# Altium PCB PCB1.PcbDoc
Units mm, origin at the board's own origin, x right, y up, seen from the top; angles counter-clockwise.
Board outline 251 x 111.5 mm, 2 copper layers (Top Layer, Bottom Layer); 152 components, 141 nets, 501 pads, 350 vias.
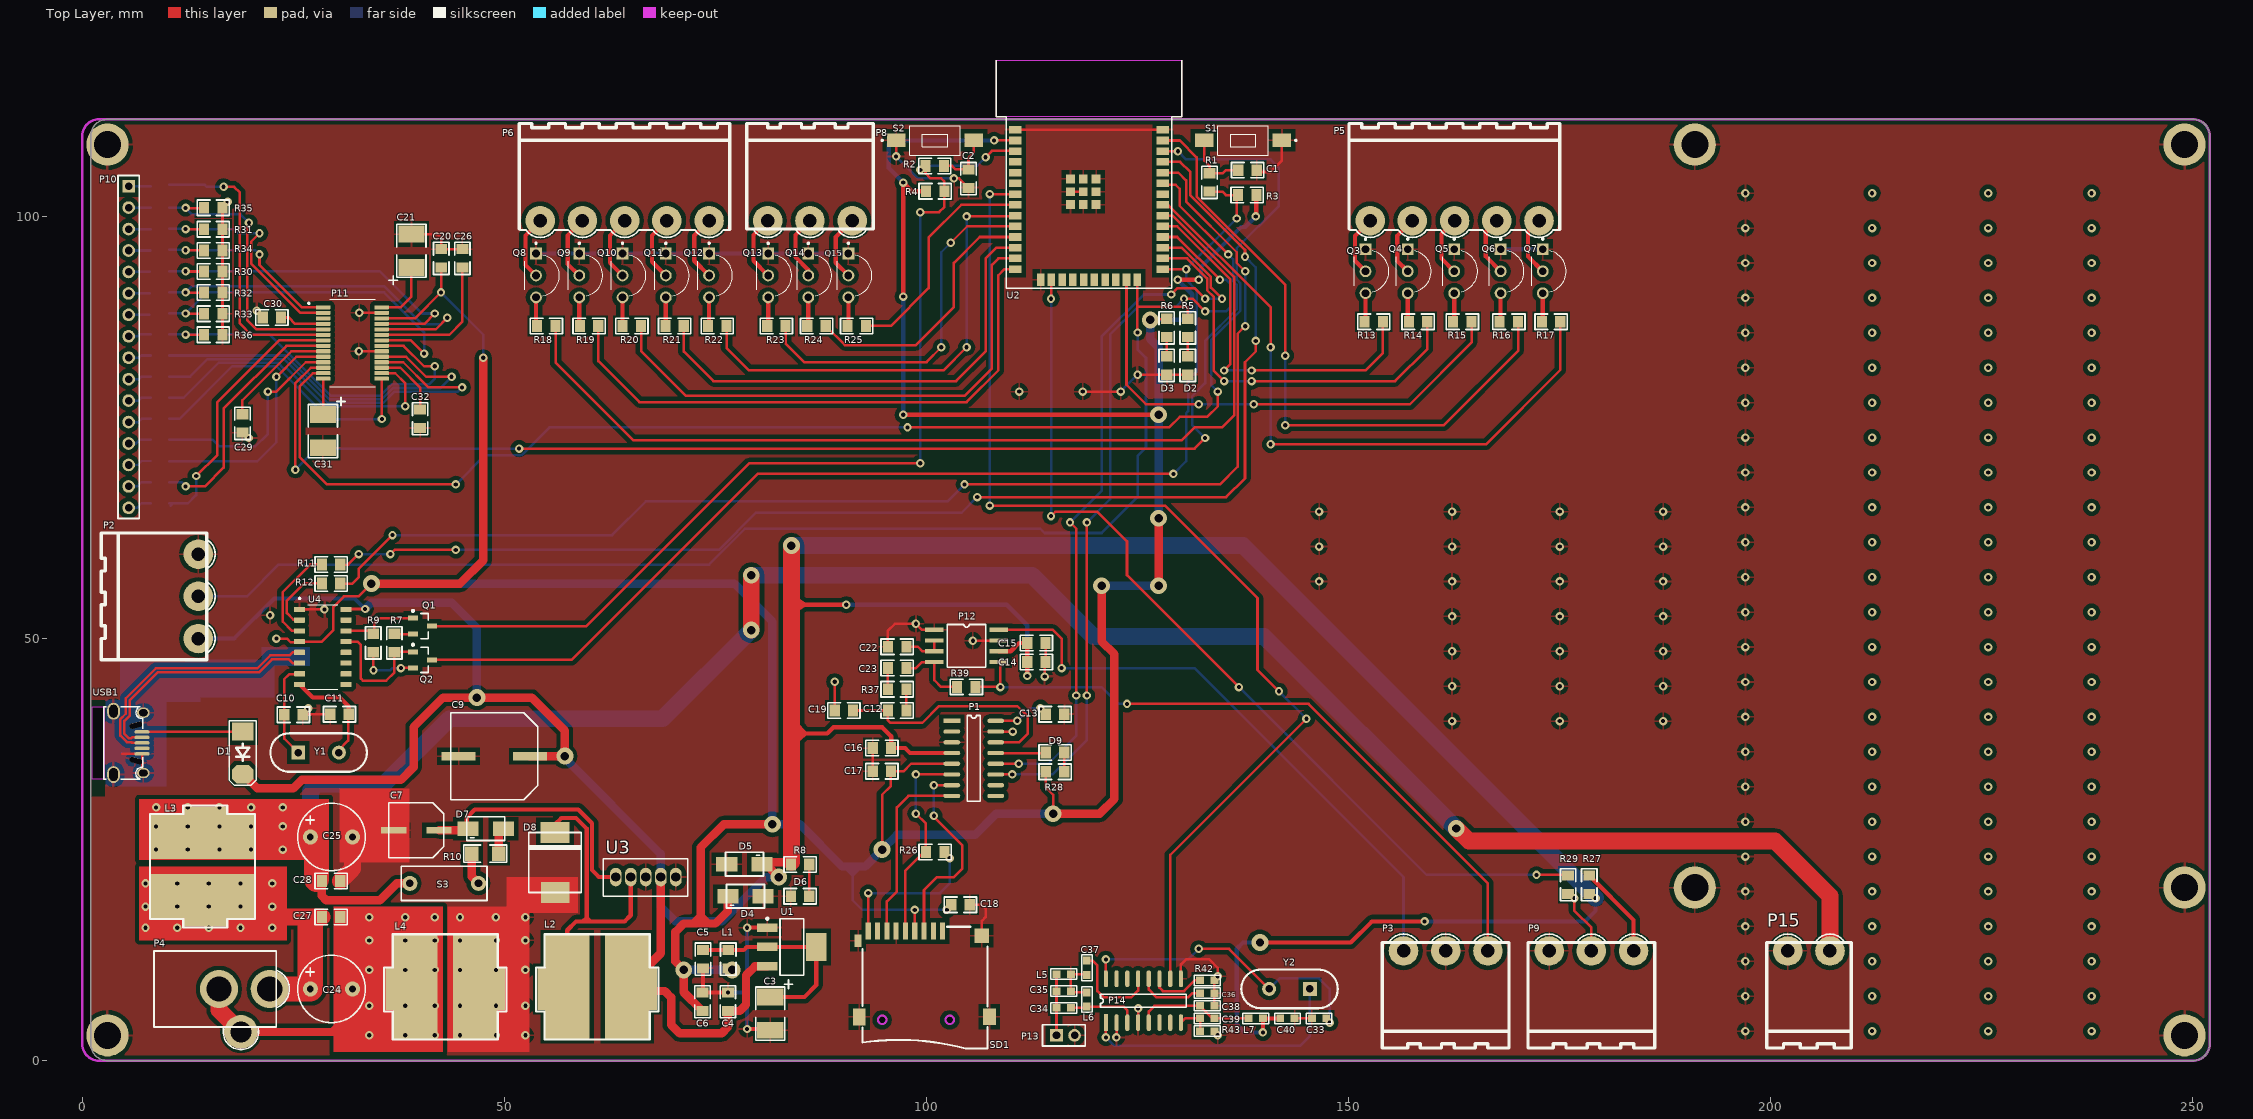
[diagram p0: Top Layer view]
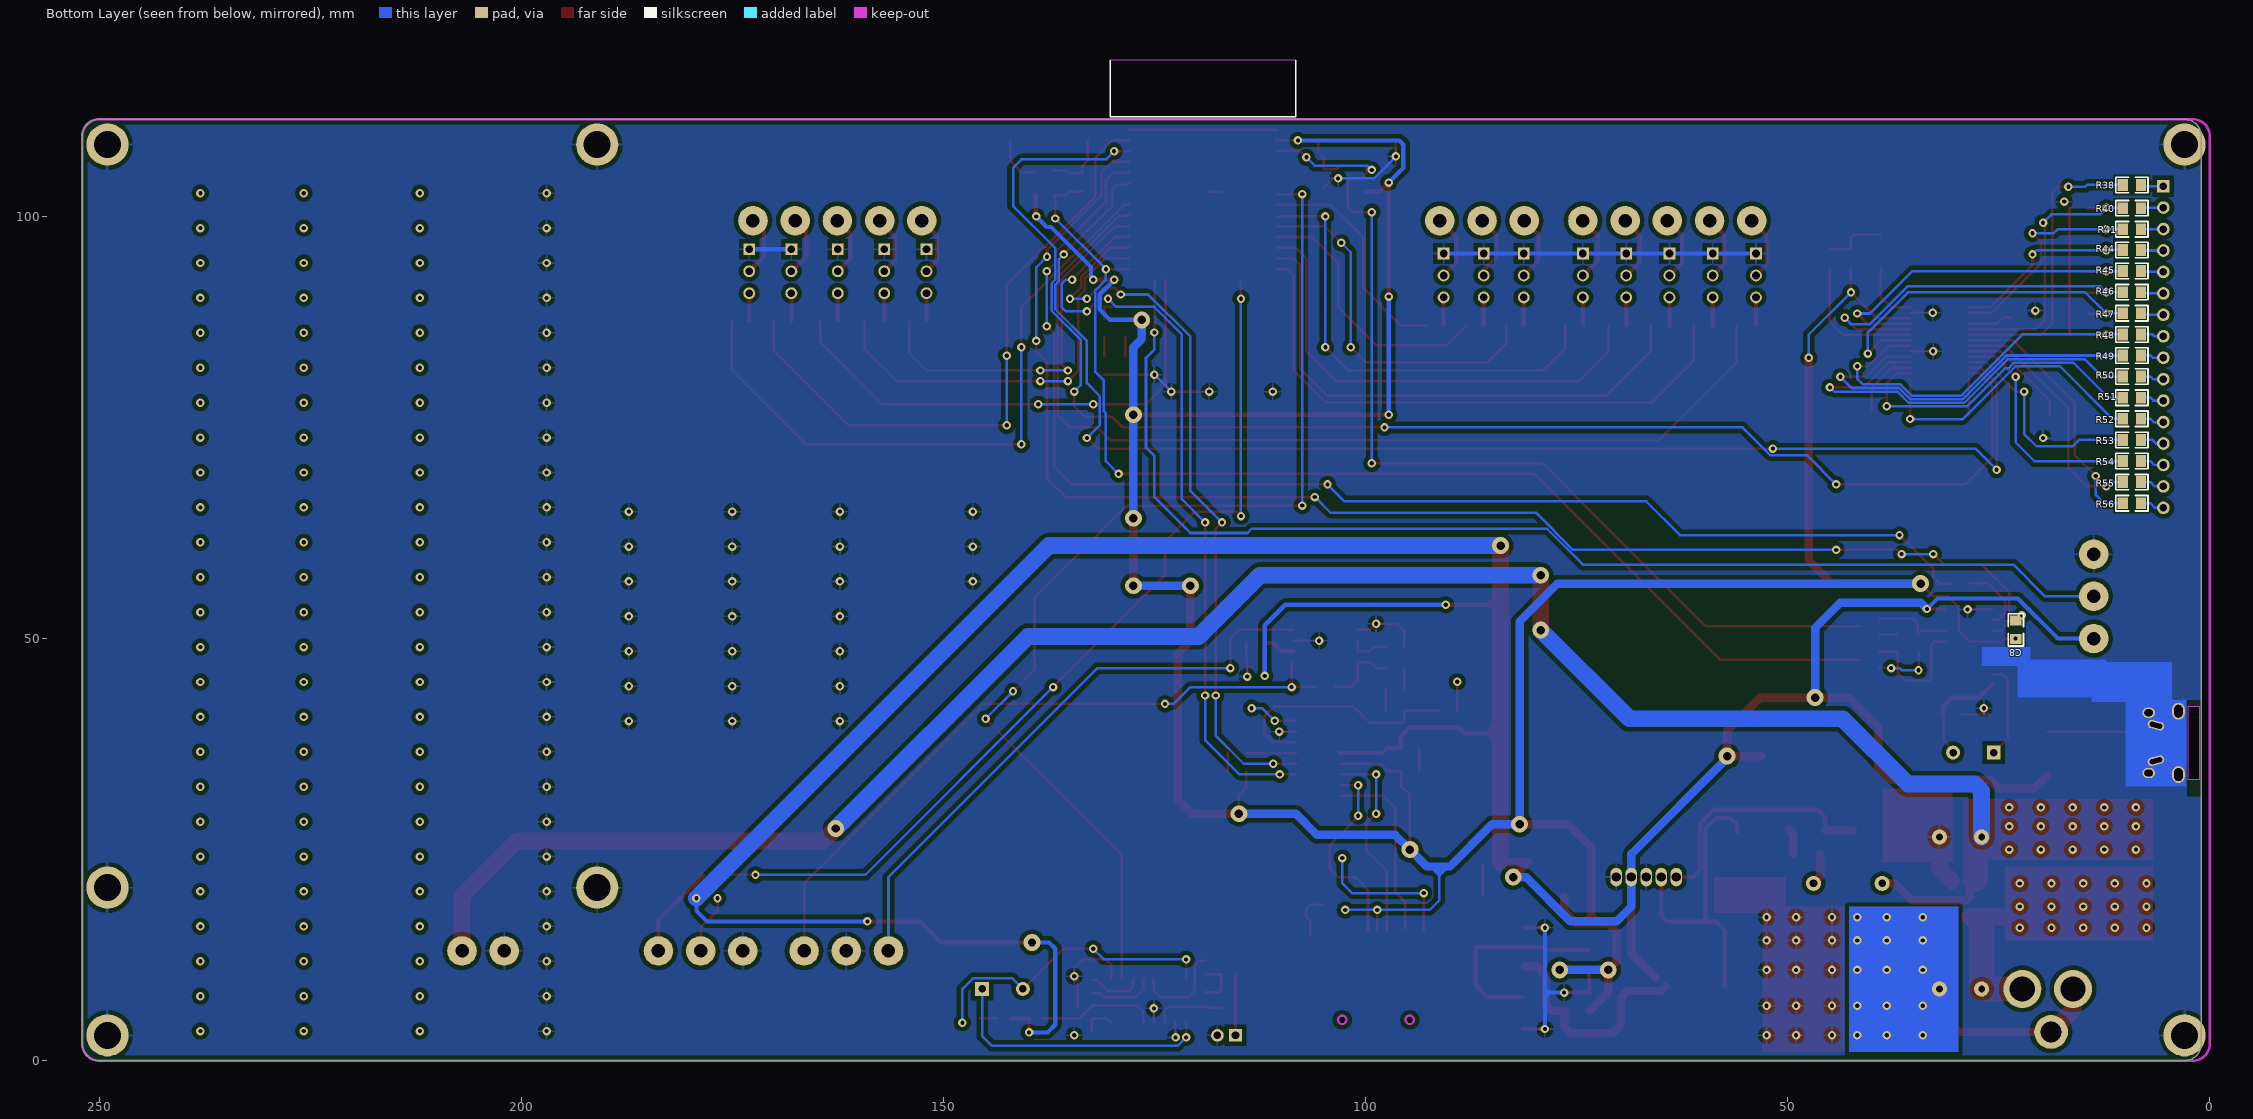
[diagram p1: Bottom Layer view, seen from below]

## Layer stack, top to bottom
Top Layer: signal copper 0.0356
Dielectric: dielectric 0.32, FR-4, Dk 4.8
Bottom Layer: signal copper 0.0356

## Board outline
1,2 ccw(c3,2) 3,0 250,0 ccw(c250,2) 252,2 252,109.5 ccw(c250,109.5) 250,111.5 3,111.5 ccw(c3,109.5) 1,109.5

## Design rules (kind name [scope] priority, off if disabled: settings)
Clearance [All] p1: gap=0.125
DiffPairsRouting [All] p1: maxlimit=0.18 minlimit=0.18 mostfreqgap=0.18 maxuncoupledlength=12.7
PolygonConnect [All] p1: connectstyle=Relief reliefconductorwidth=0.254 reliefentries=4 polygonreliefangle="90 Angle"
RoutingVias [All] p1: holewidth=0.5 width=1 viastyle="Through Hole" minholewidth=0.5 minwidth=1 maxholewidth=1 maxwidth=2
SilkscreenOverComponentPads [All] p1: minsilkscreentomaskgap=0.254
SolderMaskExpansion [All] p1: expansion=0.102
Width [All] p1: maxlimit=3 minlimit=0.2 preferedwidth=0.3
26 further rules are at their usual default settings.

## Classes and differential pairs
differential pair D: +D_P -D_N

## Components (designator, comment, footprint, x,y, rotation, side; value= is the part's Value field where it differs from the comment)
C1 "Cap" smd_805 138,105.5 r270 top
C2 "Cap" smd_805 105,104.5 r180 top
C3 "Cap Pol1" C_B 81.5,5.5 r180 top
C4 "Cap" smd_805 76.5,7 r180 top
C5 "Cap" smd_805 73.5,12 r0 top
C6 "Cap" smd_805 73.5,7 r180 top
C7 "Cap Pol1" C_CYL_SMD2 39.5,27.5 r0 top
C8 "Cap" smd_805 23,51 r180 bottom
C9 "Cap Pol1" C_CYL_SMD 49,36 r0 top
C10 "Cap" smd_805 25,41 r270 top
C11 "Cap" smd_805 30.5,41 r90 top
C12 "Cap" smd_805 96.5,41.5 r270 top
C13 "Cap" smd_805 115.25,41 r90 top
C14 "Cap" smd_805 113,47.25 r270 top
C15 "Cap" smd_805 113,49.5 r270 top
C16 "Cap" smd_805 94.75,37 r90 top
C17 "Cap" smd_805 94.75,34.25 r90 top
C18 "Cap" smd_805 104,18.5 r270 top
C19 "Cap" smd_805 90.25,41.449 r90 top
C20 "Cap" smd_805 42.5,95 r0 top
C21 "Cap Pol1" c_b 39,96 r0 top
C22 "Cap" smd_805 96.551,49 r90 top
C23 "Cap" smd_805 96.5,46.534 r270 top
C24 "Cap Pol1" cap_pol_25v 29.5,8.5 r0 top
C25 "Cap Pol1" cap_pol_25v 29.5,26.5 r0 top
C26 "Cap" smd_805 45,95 r0 top
C27 "Cap" smd_805 29.5,17 r90 top
C28 "Cap" smd_805 29.5,21.25 r90 top
C29 "Cap" smd_805 19,75.5 r180 top
C30 "Cap" smd_805 22.5,88 r90 top
C31 "Cap Pol1" C_B 28.5,74.5 r180 top
C32 "Cap" smd_805 40,76 r0 top
C33 "Cap" 0603 146.5,5 r180 top
C34 "Cap" 0603 116.25,6.25 r0 top
C35 "Cap" 0603 116.25,8.25 r0 top
C36 "Cap" 0603 133.25,8 r0 top
C37 "Cap" 0603 119,11 r270 top
C38 "Cap" 0603 133.25,6.5 r0 top
C39 "Cap" 0603 133.25,5 r0 top
C40 "Cap" 0603 142.75,5 r180 top
D1 "Diode" DO-214AC 19,39 r270 top
D2 "LED1" smd_805 130.924,82.317 r0 top
D3 "LED1" smd_805 128.424,82.317 r0 top
D4 "SMBJ 3V3" TVS 78.5,19.5 r90 top
D5 "SMBJ 5V" TVS 78.5,23.25 r270 top
D6 "LED0" smd_805 85,19.5 r270 top
D7 "Diode 1N4007" TVS 47.75,27.5 r90 top
D8 "SM5822" DO_214_AB_SMC 56,23.5 r90 top
D9 "LED1" smd_805 115.199,36.517 r270 top
L1 "FERRIT BEAD" smd_805 76.5,12 r0 top
L2 "Inductor" induc_smd 61,9 r0 top
L3 "Inductor" induc_smd 14,23 r90 top
L4 "Inductor" induc_smd 43,9 r0 top
L5 "Inductor" 0603 116.25,10.25 r180 top
L6 "Inductor" 0603 119,7.25 r270 top
L7 "Inductor" 0603 139,5 r0 top
P1 "Header 8X2A" SOP16 103,40.25 r0 top
P2 "SERVO MOTOR" PHOENIX_3 13.75,55 r270 top
P3 "SPEAKEROUT" PHOENIX_3 161.5,13 r0 top
P4 "JACK INPUT" ADAP_JACK 8.5,4 r0 top
P5 "Header 5" PHOENIX_5 162.5,99.5 r180 top
P6 "Header 5" PHOENIX_5 64.199,99.5 r180 top
P8 "Header 3" PHOENIX_3 86.199,99.5 r180 top
P9 "Header 3" PHOENIX_3 178.75,13 r0 top
P10 "Header 16" HDR1X16 5.5,103.58 r270 top
P11 "Header 14X2" ssop28 32,85 r0 top
P12 "8002A" sop8 104.75,49.25 r0 top
P13 "Header 2" HDR1X2 115,3 r0 top
P14 "Header 8X2A" SOP16 121.25,4.5 r90 top
P15 "+12v Outpot" PHOENIX_2 204.5,12.84 r0 top
Q1 "J3Y-NPN" sot-23 40.256,51.5 r270 top
Q2 "J3Y-NPN" sot-23 40.256,47.5 r270 top
Q3 "NPN" to-92 152,93.5 r270 top
Q4 "NPN" to-92 157,93.5 r270 top
Q5 "NPN" to-92 162.5,93.5 r270 top
Q6 "NPN" to-92 168,93.5 r270 top
Q7 "NPN" to-92 173,93.5 r270 top
Q8 "NPN" to-92 53.75,93 r270 top
Q9 "NPN" to-92 58.875,93 r270 top
Q10 "NPN" to-92 64,93 r270 top
Q11 "NPN" to-92 69.125,93 r270 top
Q12 "NPN" to-92 74.25,93 r270 top
Q13 "NPN" to-92 81.25,93 r270 top
Q14 "NPN" to-92 86,93 r270 top
Q15 "NPN" to-92 90.75,93 r270 top
R1 "Res1" smd_805 133.5,104 r0 top
R2 "Res1" smd_805 100.949,106 r270 top
R3 "Res1" smd_805 138,102.5 r90 top
R4 "Res1" smd_805 101,103 r270 top
R5 "Res1" smd_805 130.975,86.817 r180 top
R6 "Res1" smd_805 128.475,86.817 r180 top
R7 "Res1" smd_805 37,49.5 r180 top
R8 "Res1" smd_805 85,23.25 r270 top
R9 "Res1" smd_805 34.5,49.5 r180 top
R10 "Res2" smd_1206 47.75,24.5 r270 top
R11 "Res1" smd_805 29.5,58.75 r90 top
R12 "Res1" smd_805 29.5,56.5 r90 top
R13 "Res1" smd_805 153,87.5 r90 top
R14 "Res1" smd_805 158.25,87.5 r90 top
R15 "Res1" smd_805 163.5,87.5 r90 top
R16 "Res1" smd_805 169,87.5 r90 top
R17 "Res1" smd_805 174,87.5 r90 top
R18 "Res1" smd_805 55,87 r90 top
R19 "Res1" smd_805 60.062,87 r90 top
R20 "Res1" smd_805 65.125,87 r90 top
R21 "Res1" smd_805 70.187,87 r90 top
R22 "Res1" smd_805 75.25,87 r90 top
R23 "Res1" smd_805 82.25,87 r90 top
R24 "Res1" smd_805 87,87 r90 top
R25 "Res1" smd_805 91.75,87 r90 top
R26 "Res1" smd_805 101,24.75 r270 top
R27 "Res1" smd_805 178.525,20.86 r180 top
R28 "Res1" smd_805 115.199,34.25 r270 top
R29 "Res1" smd_805 176.025,20.86 r180 top
R30 "Res1" smd_805 15.5,93.5 r270 top
R31 "Res1" smd_805 15.5,98.5 r270 top
R32 "Res1" smd_805 15.5,91 r270 top
R33 "Res1" smd_805 15.5,88.5 r270 top
R34 "Res1" smd_805 15.5,96 r270 top
R35 "Res1" smd_805 15.5,101.051 r270 top
R36 "Res1" smd_805 15.5,86 r270 top
R37 "Res1" smd_805 96.5,44.017 r270 top
R38 "Res1" smd_805 9.25,103.75 r270 bottom
R39 "Res1" smd_805 104.75,44.25 r90 top
R40 "Res1" smd_805 9.25,101 r270 bottom
R41 "Res1" smd_805 9.25,98.5 r270 bottom
R42 "Res1" 0603 133.25,9.5 r180 top
R43 "Res1" 0603 133.25,3.5 r180 top
R44 "Res1" smd_805 9.25,96.051 r270 bottom
R45 "Res1" smd_805 9.25,93.551 r270 bottom
R46 "Res1" smd_805 9.25,91.051 r270 bottom
R47 "Res1" smd_805 9.25,88.551 r270 bottom
R48 "Res1" smd_805 9.25,86.051 r270 bottom
R49 "Res1" smd_805 9.25,83.551 r270 bottom
R50 "Res1" smd_805 9.25,81.051 r270 bottom
R51 "Res1" smd_805 9.25,78.551 r270 bottom
R52 "Res1" smd_805 9.25,76.051 r270 bottom
R53 "Res1" smd_805 9.25,73.551 r270 bottom
R54 "Res1" smd_805 9.25,71.051 r270 bottom
R55 "Res1" smd_805 9.25,68.551 r270 bottom
R56 "Res1" smd_805 9.25,66.051 r270 bottom
S1 "SWITCH" SW_SMd_2pin 137.5,109 r180 top
S2 "SWITCH" SW_SMd_2pin 101,109 r0 top
S3 "SW-SPST" KEY1 43,21 r0 top
SD1 "SD_CARD" SD_CARD_HOLDER 99,8.75 r180 top
U1 "AMS1117-3.3" SOT223 84,13.5 r270 top
U2 "ESP32-WROOM-32" ESP32-WROOM-32 119.25,105 r0 top
U3 "LM2576HVT" LM2576 66.75,21.75 r0 top
U4 "CH340G" SOIC127P600X180-16N 28.5,49 r0 top
USB1 "USB MICRO USB_AB_receptacle" USB_MICRO_USB_AB_receptacle 38.75,47.75 r180 top
Y1 "XTAL" crystal 28,36.5 r0 top
Y2 "XTAL" crystal 143,8.5 r180 top

## Footprints (in the part's own frame and the unit in brackets; to place one, negate y for a bottom-side part, rotate by r counter-clockwise, add the part's x,y. Pads: shape width x height; smd on the part's side, far side on the other; paste and mask are expansions set on the pad)
0603 [mil]
  rect 37x35 smd: 1(-33.5,0) 2(33.5,0)
  silkscreen extent -60,-24 60,24, body extent -31,-16 31,16, height 12
ADAP_JACK [mm]
  round 4.5 hole 3: 1(7.7,4.5) 2(13.7,4.5)
  round 4 hole 2.5: 1(10.3,-0.6)
  silkscreen extent 0,-2.68 16.04,9, body extent -0.1,-0.5 14.7,9, height 10
C_B [mm]
  rect 3.1x2 smd: 1(-0.002,-2.041) 2(-0.002,1.896)
  silkscreen extent -2.67,-4.07 1.73,3.07, body extent -1.4,-1.78 1.4,1.78, height 2.23
c_b [mm]
  rect 3.1x2 smd: 1(-0.002,-2.041) 2(-0.002,1.896)
  silkscreen extent -2.67,-4.07 1.73,3.07, body extent -1.4,-1.78 1.4,1.78, height 2.23
C_CYL_SMD [mm]
  rect 4x1 smd: 1(4.039,0.076) 2(-4.42,0.076)
  silkscreen extent -5.33,-5.08 4.97,5.22, body extent -5.33,-5.08 4.97,5.22, height 10
C_CYL_SMD2 [mm]
  rect 3x0.8 smd: 1(2.769,-0.203) 2(-2.616,-0.203)
  silkscreen extent -3.17,-3.45 3.32,3.05, body extent -3.17,-3.45 3.32,3.05, height 5
cap_pol_25v [mm]
  round 1.8 hole 0.8: 1(-2.475,0) 2(2.525,0)
  silkscreen extent -3.97,-4 4.03,4
crystal [mil] "16 Mhz Crystal footprint"
  rect 65x65 hole 35: 1(-95,0)
  round 65 hole 35: 2(95,0)
  silkscreen extent -225,-90 225,90, body extent -220,-89 220,95, height 143
DO-214AC [mil] "1N4001-7 SMD DIODE"
  rect 85x100 smd: 1(0,0)
  oct 85x100 smd: 2(200,0)
  silkscreen extent -50,-63 250,64, body extent -8,-55 208,55, height 88
DO_214_AB_SMC [mm]
  rect 2.5x3.4 smd: 1(-3.581,-0.025) 2(3.531,0)
  silkscreen extent -3.58,-3.12 3.53,3.1
ESP32-WROOM-32 [mm]
  rect 1.5x0.9 smd: 1(-8.75,5.26) 2(-8.75,3.99) 3(-8.75,2.72) 4(-8.75,1.45) 5(-8.75,0.18) 6(-8.75,-1.09) 7(-8.75,-2.36) 8(-8.75,-3.63) 9(-8.75,-4.9) 10(-8.75,-6.17) 11(-8.75,-7.44) 12(-8.75,-8.71) 13(-8.75,-9.98) 14(-8.75,-11.25) 25(8.75,-11.25) 26(8.75,-9.98) 27(8.75,-8.71) 28(8.75,-7.44) 29(8.75,-6.17) 30(8.75,-4.9) 31(8.75,-3.63) 32(8.75,-2.36) 33(8.75,-1.09) 34(8.75,0.18) 35(8.75,1.45) 36(8.75,2.72) 37(8.75,3.99) 38(8.75,5.26)
  rect 0.9x1.5 smd: 15(-5.72,-12.51) 16(-4.45,-12.51) 17(-3.18,-12.51) 18(-1.91,-12.51) 19(-0.64,-12.51) 20(0.63,-12.51) 21(1.9,-12.51) 22(3.17,-12.51) 23(4.44,-12.51) 24(5.71,-12.51)
  rect 1.05x1.05 smd: DAP[1](-2.2,-0.56) DAP[2](-0.68,-0.56) DAP[3](0.84,-0.56) DAP[4](-2.2,-2.08) DAP[5](-0.68,-2.08) DAP[6](0.84,-2.08) DAP[7](-2.2,-3.6) DAP[8](-0.68,-3.6) DAP[9](0.84,-3.6)
  Keep-Out Layer region: 11,6.8 -11,6.8 -11,13.5 11,13.5
  Keep-Out Layer region: 11,6.8 -11,6.8 -11,13.5 11,13.5
  silkscreen extent -11,-13.5 11,13.5
HDR1X2 [mm] "Connector; Header; 2 Position"
  rect 1.5x1.5 hole 0.9: 1(0.4,0)
  round 1.5 hole 0.9: 2(2.54,0)
  silkscreen extent -1.27,-1.27 3.81,1.27
HDR1X16 [mm] "Connector; Header; 16 Position"
  rect 1.5x1.5 hole 0.9: 1(0,0)
  round 1.5 hole 0.9: 2(2.54,0) 3(5.08,0) 4(7.62,0) 5(10.16,0) 6(12.7,0) 7(15.24,0) 8(17.78,0) 9(20.32,0) 10(22.86,0) 11(25.4,0) 12(27.94,0) 13(30.48,0) 14(33.02,0) 15(35.56,0) 16(38.1,0)
  silkscreen extent -1.27,-1.27 39.37,1.27
induc_smd [mm]
  rect 2x5 smd: 1(-6.096,-0.508) 2(6.096,-0.508)
  rect 5.3x12.4 smd: 1(-3.556,-0.254) 2(3.556,-0.254)
  silkscreen extent -7.23,-6.48 7.24,5.97
KEY1 [mm]
  round 1.8 hole 0.9: 1(-4.191,0) 2(3.937,0)
  silkscreen extent -5.21,-2.03 4.95,2.03, body extent -5.21,-2.03 4.95,2.03, height 7.1
LM2576 [mm]
  oval 1.4x2.2 hole 1.1: 1(-3.556,0) 2(-1.778,0) 3(0,0) 4(1.778,0) 5(3.556,0)
  silkscreen extent -5.04,-2.27 4.99,2.18
PHOENIX_2 [mm]
  round 3.5 hole 1.6: 1(-2.487,0.16) 2(2.513,0.16)
  silkscreen extent -4.99,-11.34 5.01,2.16
PHOENIX_3 [mm]
  round 3.5 hole 1.6: 1(5,0) 2(0,0) 3(-5,0)
  silkscreen extent -7.5,-11.5 7.5,2
PHOENIX_5 [mm]
  round 3.5 hole 1.6: 1(9.949,0) 2(4.949,0) 3(-0.051,0) 4(-5.051,0) 5(-10.051,0)
  silkscreen extent -12.5,-11.5 12.45,2
SD_CARD_HOLDER [mm]
  rect 0.6x2 smd: 1(-2.906,-6.592) 2(-1.806,-6.592) 3(-0.706,-6.592) 4(0.394,-6.592) 5(1.494,-6.592) 6(2.594,-6.592) 7(3.694,-6.592) 8(4.794,-6.592) 9(5.894,-6.592)
  rect 0.8x1.5 smd: 10(7.103,-5.458)
  rect 1.7x1.7 smd: 11(-7.556,-6.051)
  rect 1.5x2 smd: 12(6.976,3.559) 13(-8.456,3.549)
  Keep-Out Layer lines w0.254: 4.744,3.908 cw(c4.244,3.908) 3.744,3.908 cw(c4.244,3.908) 4.744,3.908 ; -3.256,3.908 cw(c-3.756,3.908) -4.256,3.908 cw(c-3.756,3.908) -3.256,3.908
  silkscreen extent -8.21,-7.11 6.59,7.31
smd_805 [mm]
  rect 1.4x1.2 smd: 1(0.025,1.118) 2(0.025,-1.067)
  silkscreen extent -0.89,-1.88 0.94,1.93, body extent -0.66,-1.07 0.71,1.14, height 1.1
smd_1206 [mm]
  rect 1.7x1.6 smd: 1(-0.025,-1.6) 2(-0.025,1.563)
  silkscreen extent -1.04,-2.57 0.99,2.54, body extent -0.81,-1.6 0.79,1.6, height 1.4
SOIC127P600X180-16N [mm]
  rrect25% 1.31x0.62 smd: 1(-2.75,4.445) 2(-2.75,3.175) 3(-2.75,1.905) 4(-2.75,0.635) 5(-2.75,-0.635) 6(-2.75,-1.905) 7(-2.75,-3.175) 8(-2.75,-4.445) 9(2.75,-4.445) 10(2.75,-3.175) 11(2.75,-1.905) 12(2.75,-0.635) 13(2.75,0.635) 14(2.75,1.905) 15(2.75,3.175) 16(2.75,4.445)
  silkscreen extent -2.85,-5 1.78,5.85, body extent -3,-5 3,5, height 1.8
sop8 [mm]
  rect 2.2x0.5 smd: 1(-3.81,1.778) 2(-3.81,0.508) 3(-3.81,-0.762) 4(-3.81,-2.032) 5(3.806,-2.032) 6(3.806,-0.762) 7(3.806,0.508) 8(3.806,1.778)
  silkscreen extent -2.29,-2.67 2.29,2.41
SOP16 [mm]
  rect 2x0.5 smd: 1(0,0)
  oval 2x0.5 smd: 2(0,-1.27) 3(0,-2.54) 4(0,-3.81) 5(0,-5.08) 6(0,-6.35) 7(0,-7.62) 8(0,-8.89) 9(5.2,-8.89) 10(5.2,-7.62) 11(5.2,-6.35) 12(5.2,-5.08) 13(5.2,-3.81) 14(5.2,-2.54) 15(5.2,-1.27) 16(5.2,0)
  silkscreen extent 1.84,-9.53 3.36,0.64
SOT223 [mm]
  rect 1x2.4 smd: 1(-2.269,-2.85) 2(0.031,-2.85) 3(2.331,-2.85)
  rect 3.3x2.4 smd: 2(0.031,2.95)
  silkscreen extent -3.44,-2.97 3.38,1.45, body extent -3.21,-3.44 3.27,3.54, height 1.64
sot-23 [mm]
  rect 0.6x1.15 smd: 1(0.981,-1.081) 2(-0.919,-1.081) 3(0.031,1.169)
  silkscreen extent -1.89,-1.21 1.53,0.74, body extent -1.42,-1.18 1.48,1.12, height 1
ssop28 [mm] "ssop28"
  rrect25% 1.7x0.48 smd: 1(-3.46,4.225) 2(-3.46,3.575) 3(-3.46,2.925) 4(-3.46,2.275) 5(-3.46,1.625) 6(-3.46,0.975) 7(-3.46,0.325) 8(-3.46,-0.325) 9(-3.46,-0.975) 10(-3.46,-1.625) 11(-3.46,-2.275) 12(-3.46,-2.925) 13(-3.46,-3.575) 14(-3.46,-4.225) 15(3.46,-4.225) 16(3.46,-3.575) 17(3.46,-2.925) 18(3.46,-2.275) 19(3.46,-1.625) 20(3.46,-0.975) 21(3.46,-0.325) 22(3.46,0.325) 23(3.46,0.975) 24(3.46,1.625) 25(3.46,2.275) 26(3.46,2.925) 27(3.46,3.575) 28(3.46,4.225)
  silkscreen extent -5.26,-5.17 2.69,5.17
SW_SMd_2pin [mm]
  rect 2.18x1.6 smd: 1(-4.6,0) 2(4.6,0)
  silkscreen extent -6.35,-1.75 3,1.75
to-92 [mm]
  rect 1.4x1.4 hole 0.9: 1(-2.6,0)
  round 1.4 hole 0.9: 2(0,0) 3(2.6,0)
  silkscreen extent -3.86,-1.33 2.41,2.77, body extent -2.41,0 2.41,3.68, height 5.34
TVS [mm]
  rect 1.7x2.5 smd: 1(-0.025,-2.159) 2(-0.025,2.032)
  silkscreen extent -1.42,-2.32 1.38,2.18, body extent -1.5,-2.76 1.42,2.74, height 2.23
USB_MICRO_USB_AB_receptacle [mm]
  oval 1.8x0.4 smd mask+0.05: 1(31.662,8.809) 2(31.662,9.459) 3(31.662,10.109) 4(31.662,10.759) 5(31.662,11.409)
  oval 1.5x1.2 hole 0.8 slot 1 at 0 deg mask+0.05: 5(31.512,6.534) 5(31.512,13.684)
  oval 1.5x0.6 / inner oval 1.5x0.6 / far side oval 2x1 hole 0.6 slot 1.5 at 15 deg rot 15 mask+0.05: 5(32.374,8.009)
  oval 1.5x0.6 / inner oval 1.5x0.6 / far side oval 2x1 hole 0.6 slot 1.5 at 165 deg rot 165 mask+0.05: 5(32.374,12.209)
  oval 1.5x2 hole 1 slot 1.5 at 90 deg mask+0.05: 5(35.037,6.359) 5(35.037,13.859)
  Keep-Out Layer board cut-out: 36.162,14.409 37.574,14.409 37.574,5.809 36.162,5.809
  silkscreen extent 31.57,5.81 36.17,14.42, body extent 31.76,5.78 37.66,14.43, height 2.8

## Part data
C1 C2 C4 C5 C6 C8 C10 C11 C12 C13 C14 C15 C16 C17 C18 C19 C20 C22 C23 C26 C27 C28 C29 C30 C32 C33 C34 C35 C36 C37 C38 C39 C40: "Capacitor"
C3 C7 C9 C21 C24 C25 C31: "Polarized Capacitor (Radial)"
D1: "SS110-A"
D2 D3 D9: "Typical RED GaAs LED"
D4 D5 D8: library part "D Zener", "Zener Diode"
D6: "Typical INFRARED GaAs LED"
D7: "1 Amp General Purpose Rectifier"
L1: library part Inductor, "Inductor"
P1 P14: "Header, 8-Pin, Dual row"
P2 P3: library part "Header 3", "Header, 3-Pin"
P4 P15: library part "Header 2", "Header, 2-Pin"
P5 P6: "Header, 5-Pin"
P8 P9: "Header, 3-Pin"
P10: "Header, 16-Pin"
P11: "Header, 14-Pin, Dual row"
P12: library part "Header 4X2", "Header, 4-Pin, Dual row"
P13: "Header, 2-Pin"
Q1 Q2: library part NPN, "NPN Bipolar Transistor"
Q3 Q4 Q5 Q6 Q7 Q8 Q9 Q10 Q11 Q12 Q13 Q14 Q15: "NPN Bipolar Transistor"
R1 R2 R3 R4 R5 R6 R7 R8 R9 R10 R11 R12 R13 R14 R15 R16 R17 R18 R19 R20 R21 R22 R23 R24 R25 R26 R27 R28 R29 R30 R31 R32 R33 R34 R35 R36 R37 R38 R39 R40 R41 R42 R43 R44 R45 R46 R47 R48 R49 R50 R51 R52 R53 R54 R55 R56: "Resistor"
S1 S2: library part SW-SPST, "Single-Pole, Single-Throw Switch"
S3: "Single-Pole, Single-Throw Switch"
SD1: library part MICRO_SD_CARD_HOLDER
U1: library part LD1117DT33
U3: library part LM2576HVT-3.3, "SIMPLE SWITCHER® 3A Step-Down Voltage Regulator, 5-pin TO-220"
U4: "USB Interface Integrated Circuit"
Y1 Y2: "Crystal Oscillator 12MHZ"

## Free pads (board coordinates)
  round 5 hole 3.2: 0(3,3) 0(3,108.5) 0(191,20.5) 0(191,108.5) 0(249,3) 0(249,20.5) 0(249,108.5)

## Via types
v1: diameter 1, hole 0.5, Top Layer to Bottom Layer, 329 vias
v2: diameter 2, hole 1, Top Layer to Bottom Layer, 19 vias
v3: diameter 1.2, hole 1.2, Top Layer to Bottom Layer, 2 vias

## Nets (pads, with @x,y where several pads share a name; then routed paths per layer and width w, separated by ;. In a path a pad name is that pad's centre, name@x,y a point inside that pad or via, vN(x,y) a via of type N, cw(c..) or ccw(c..) an arc to the next point about the centre after c; other vN are vias at no path point)
+3V3: C6.1 C8.2 C17.2 C18.2 C20.2 D4.2 L1.2 P1.5 P11.26 R3.2 R4.2 R6.2 R28.2 SD1.4 U2.2 U4.4 | length 451.7
  Top Layer w0.3: v1(23,50) 24.25,50 24.692,49.558 25.673,49.558 U4.4 28.385,49.635 29.75,51 29.75,53.75 31,55 32.75,55 v2(34.25,56.5) ; P11.26 39.425,87.925 42.525,91.025 C20.2 ; v2(94.75,25) 94.75,31.5 95.75,32.5 C17.2@95.75,34.25 ; C17.2 97.275,34.275 98.17,35.17 P1.5 ; SD1.4 v1(98.606,17.856) ; v1(108,109) U2.2@110.49,109 ; R28.2 114.132,32.368 115,31.5 v2(115,29.25) ; v2@126.54,87.79 R6.2@128.356,87.79
  Top Layer w0.5: C6.1@73.415,5.942 C6.1 ; v1(97.25,76.5) v2(127.5,76.5) ; v1(97.25,90.5) v1(97.25,104) 98.275,102.975 R4.2 ; U2.2@110.49,109 U2.2 ; v1(129.75,92.5) v1(132.25,92.5) ; v1@139.067,100.067 R3.2
  Top Layer w1: v2(34.25,56.5) 44.75,56.5 47.5,59.25 v1(47.5,83.25) ; C6.1@73.415,5.942 71.25,8.107 v2(71.25,10.75) 70.25,11.75 70.25,15.25 71.25,16.25 73.25,16.25 ; D4.2 76.468,17.718 75,16.25 73.25,16.25 ; v2(81.75,28) 76,28 73.25,25.25 73.25,16.25 ; v2(115,29.25) 120.5,29.25 122.25,31 122.25,48.154 120.75,49.654 v2(120.75,56.25) ; v2(127.5,56.25) v2(127.5,64.25)
  Bottom Layer w0.3: v1(42.5,91) 47.5,86 v1(47.5,83.25) ; 91.25,23 91.25,19 92.394,17.856 v1(98.606,17.856) v1(102.394,17.856)
  Bottom Layer w0.5: v1(97.25,76.5) v1(97.25,90.5) ; v1(97.25,104) 95.525,105.725 95.525,108.525 96,109 v1(108,109) ; v2(126.5,87.75) 130.25,87.75 131.475,88.975 131.475,90.775 v1(129.75,92.5) ; v1@132.513,92.763 132.513,94.013 137.25,98.75 137.75,98.75 v1(139,100)
  Bottom Layer w1: v2(34.25,56.5) 77.25,56.5 81.75,52 v2(81.75,28) 85,28 90,23 91.25,23 92.75,23 v2(94.75,25) 96.5,26.75 105.75,26.75 108.25,29.25 v2(115,29.25) ; v2(71.25,10.75) v2(77,10.75) ; v2(120.75,56.25) v2@127.25,56.25 ; v2(126.5,87.75) 126.5,85.5 127.5,84.5 v2(127.5,64.25)
+5V: C4.1 C9.1 C14.2 C15.2 C16.2 C40.2 D1.2 D5.2 L2.2 L7.2 P1.4 P2.1 P12.6 R8.2 R27.1 U1.3 U3.4 U4.16 | length 463
  Top Layer w0.3: U4.16@31.305,53.5 v1(33.5,53.5)
  Top Layer w0.5: 84,38.75 88.25,38.75 89,39.5 94.75,39.5 95.817,38.433 C16.2 97.475,37.025 98.06,36.44 P1.4 ; 84,54 v1(90.5,54) ; P12.6 109.988,48.488 110.975,49.475 C15.2 C14.2 v1(111.933,45.567) ; v2(139.5,14) 150.25,14 152.75,16.5 v1(159,16.5) ; v1(139.851,3.351) L7.2 C40.2
  Top Layer w1: D1.2@19.25,33.75 20.75,32.25 25,32.25 26,33.25 37.75,33.25 39.25,34.75 39.25,39.5 42.75,43 v2(46.75,43) 53.25,43 57.174,39.076 v2(57.174,36.076) C9.1 ; L2.2@64.556,8.746 65.052,8.25 69,8.25 69.75,7.5 69.75,4.25 70.75,3.25 75.75,3.25 76.475,3.975 C4.1 77.882,5.882 78.625,6.625 78.625,10.125 79.669,11.169 U1.3 ; L2.2@65.699,9.889 68.528,12.718 U3.4 ; v2(82.5,21.75) 80.75,23.5 R8.2@83.75,23.5
  Top Layer w2: R8.2@84,23.5 84,38.75 84,54 v2(84,61)
  Bottom Layer w0.5: P2.1 18,50 22.75,54.75 32.25,54.75 v1(33.5,53.5) ; v1(90.5,54) 109.5,54 111.933,51.567 v1(111.933,45.567) ; v2(139.5,14) 137.5,14 136.75,13.25 136.75,4.25 137.649,3.351 v1(139.851,3.351) ; v1(159,16.5) 178,16.5 179.25,17.75 v1(179.25,19.25)
  Bottom Layer w1: v1(33.5,53.5) 34.25,54.25 43.75,54.25 46.75,51.25 v2(46.75,43) ; v2@57.174,35.826 68.5,24.5 68.5,18.25 70.25,16.5 75.75,16.5 81,21.75 v2(82.5,21.75)
  Bottom Layer w2: v2(84,61) 137.5,61 v1(179.25,19.25)
+12V: C25.1 C28.1 L3.2 P15.2 S3.1 | length 253.3
  Top Layer w1: L3.2@14.31,26.5 C25.1 ; C28.1 28.382,19.525 28.908,19 35.25,19 37.25,21 S3.1
  Top Layer w2: v2(79.25,51) v2(79.25,57.5) ; v2(162.75,27.5) 164.25,26 200.5,26 207,19.5 P15.2@207,13
  Top Layer w3: C25.1 27.75,25.775 27.75,21.5
  Bottom Layer w2: C25.1 27.025,31.975 27.8,32.75 35.75,32.75 43.5,40.5 68.75,40.5 v2(79.25,51) ; v2(79.25,57.5) 112.5,57.5 119.75,50.25 140,50.25 v2(162.75,27.5)
  other v1: 8.75,25 12.5,25 16.25,25 20,25 23.75,25 8.75,27.75 12.5,27.75 16.25,27.75 20,27.75 23.75,27.75 8.75,30 12.5,30 16.25,30 20,30 23.75,30
+12V_NOISY: C24.1 C27.1 L3.1 P4.2 | length 19.6
  Top Layer w0.3: C27.1@28.25,16.893 C27.1
  Top Layer w2: 21.75,17.025 C27.1
  Top Layer w3: P4.2 C24.1 27.025,16.5
  other v1: 7.5,15.75 11.25,15.75 15,15.75 18.75,15.75 22.5,15.75 7.5,18.25 11.25,18.25 15,18.25 18.75,18.25 22.5,18.25 7.5,21 11.25,21 15,21 18.75,21 22.5,21
AL: C19.1 | length 3.4
  Top Layer w0.3: C19.1 v1(89.132,44.882)
D_N: U4.6 USB1.2 | length 28.9
  Top Layer w0.3: USB1.2 5.915,38.291 5.83,38.206 5.5,38.206 5,38.706 5,40.25 5.641,40.891 5.641,42.712 8.929,46 16.73,46 20.949,46 22.469,47.52 24.49,47.52 24.915,47.095 U4.6
D_P: U4.5 USB1.3 | length 30.4
  Top Layer w0.3: USB1.3 5.915,37.641 5.83,37.726 5.301,37.726 4.52,38.507 4.52,40.449 5.161,41.089 5.161,42.911 8.73,46.48 16.531,46.48 20.75,46.48 22.27,48 24.55,48 24.915,48.365 U4.5
DAC_R: C12.2 C19.2 P1.14 | length 29.5
  Top Layer w0.3: C19.2 C12.2 95.433,40.317 95.75,40 99.5,40 101.5,42 110.75,42 112,40.75 112,38.75 110.96,37.71 P1.14
DTR: Q2.2 R7.1 U4.13 | length 15
  Top Layer w0.3: U4.13 32.615,49.635 33,49.25 33,45.25 33.25,45 36,45 36.975,45.975 R7.1 ; R7.1@37.011,48.419 Q2.2
EN: Q1.3 R2.2 R4.1 U2.3 | length 117.4
  Top Layer w0.3: Q1.3 59.719,51.469 79,70.75 v1(99.25,70.75) ; v1(99.25,100.5) 101.5,100.5 102.118,101.118 R4.1 102.118,104.132 101.75,104.5 100.5,104.5 99.882,105.118 R2.2 ; v1(107,107) 107.75,107.75 110.47,107.75 U2.3
  Bottom Layer w0.3: v1(99.25,70.75) v1(99.25,100.5) ; v1(99.25,105.5) 99.75,106 106,106 v1(107,107)
GND: C1.1 C2.1 C3.2 C4.2 C5.2 C6.2 C7.2 C8.1 C9.2 C10.1 C11.1 C13.2 C14.1 C15.1 C16.1 C17.1 C18.1 C20.1 C21.2 C22.1 C25.2 C26.1 C28.2 C29.1 C30.1 C31.2 C32.2 C33.2 C35.2 C36.2 C37.2 C38.2 C40.1 D2.2 D3.2 D4.1 D5.1 D6.2 D8.1 L4.2 L5.1 L6.1 P1.3 P1.15 P2.3 P3.2 P9.3 P11.20 P11.27 P12.1 P12.7 P13.2 P14.2 P14.4 P14.9 P15.1 pad.0 Q3.1 Q4.1 Q5.1 Q6.1 Q7.1 Q8.1 Q9.1 Q10.1 Q11.1 Q12.1 Q13.1 Q14.1 Q15.1 R30.1 R31.1 R32.1 R33.1 R34.1 R35.1 R36.1 R42.1 R43.1 S1.1 S2.1 SD1.6 SD1.10 SD1.11 SD1.12 SD1.13 U1.1 U2.1 U2.15 U2.38 U2.DAP[1] U2.DAP[2] U2.DAP[3] U2.DAP[4] U2.DAP[5] U2.DAP[6] U2.DAP[7] U2.DAP[8] U2.DAP[9] U3.3 U3.5 U4.1 USB1.5 | length 209.6
  Top Layer w0.3: 4.75,36.341 7.088,36.341 USB1.5@7.088,34.162 ; R36.1 R33.1 R32.1 R30.1 R34.1 R31.1 R35.1 ; U4.1 v1(28.695,53.445) ; C10.1 C10.1@26.168,41.025 ; C10.1@26.25,41.107 C10.1@26.168,41.025 ; C11.1 C10.1@26.168,41.025 ; v1(32.775,84.025) P11.20 ; v1(32.825,88.575) P11.27 ; C21.2 42.104,97.896 42.525,97.475 C20.1 C26.1 ; C17.1 C16.1 ; C22.1 95.433,50.933 96.25,51.75 v1(98.75,51.75) 99.472,51.028 P12.1 ; v1(96.4,107.1) S2.1 ; v1(103.25,104.5) 103.857,104.5 C2.1 ; C18.1 106.525,18.475 107,18 107,17 106.556,16.556 SD1.11 ; v1(105.5,49.75) 105.508,49.758 P12.7 ; P1.15 v1(110.23,38.98) ; U2.1 U2.38 ; v1(114,45.5) C14.1@114,47.107 ; C14.1 C15.1 ; U2.DAP[4]@117.08,102.92 U2.DAP[5] ; C35.2 L5.1 C37.2@118.899,10.25 ; C35.2@117.25,8.101 L6.1 ; v1(118.5,79.25) v1(123,79.25) ; v1@122.52,2.77 P14.2 ; v1(125,81.25) D3.2 D2.2 ; P14.4 v1(125.06,6.19) ; P14.9 130.14,11.39 130.75,12 133.5,12 134.5,11 v1(134.5,10) ; C38.2 C36.2 R42.1 ; C1.1 139.353,105.239 140.739,105.239 142.1,106.6 S1.1 ; C40.1 C33.2
  Top Layer w0.5: C6.2 v1(76.475,8.067) ; C6.2@73.525,8.118 C5.2 ; v1(78.75,3.75) C3.2@81.356,3.75 ; v1(78.75,15.75) 78.769,15.769 U1.1 ; P9.3 P9.3@174.5,13
  Top Layer w2: C28.2 32.025,22.734 C25.2
  Bottom Layer w0.3: v1@96.5,107 99,104.5 v1(103.25,104.5) ; v1(123,79.25) v1(125,81.25)
  Bottom Layer w0.5: Q8.1 Q9.1 Q10.1 Q11.1 Q12.1 Q13.1 Q14.1 Q15.1 ; v1(76.475,8.067) 78.75,8.067 ; v1(78.75,3.75) 78.75,8.067 ; v1(78.75,15.75) 78.75,8.067 ; Q6.1 Q7.1
  other v1: 122.5,2.75 44.75,3 49,3 52.5,3 134.5,3 197,3.5 44.75,6.5 49,6.5 52.5,6.5 197,7.635 44.75,10.75 49,10.75 52.5,10.75 197,11.771 44.75,14.25 49,14.25 52.5,14.25 197,15.906 44.75,17 49,17 52.5,17 197,20.042 197,24.177 197,28.312 197,32.448 197,36.583 162.25,40.219 175,40.219 187.25,40.219 197,40.719 26.75,41.75 162.25,44.354 175,44.354 187.25,44.354 197,44.854 162.25,48.49 175,48.49 187.25,48.49 197,48.99 162.25,52.625 175,52.625 187.25,52.625 22.25,52.75 197,53.125 146.5,56.76 162.25,56.76 175,56.76 187.25,56.76 197,57.26 146.5,60.896 162.25,60.896 175,60.896 187.25,60.896 197,61.396 146.5,65.031 162.25,65.031 175,65.031 187.25,65.031 197,65.531 197,69.667 19.75,73.75 197,73.802 197,77.937 111,79.25 197,82.073 197,86.208 20.657,88.85 197,90.344 197,94.479 197,98.615 17.25,101.75 197,102.75
GND_NOISY: C24.2 C27.2 L4.1 P4.1 | length 32.2
  Top Layer w1: P4.1@18.8,3.4 29.65,3.4 32.025,5.775 C24.2 32.025,13.725 30.567,15.183 C27.2
  Top Layer w2: P4.1@16.2,8.5 16.2,6 P4.1@18.8,3.4
  other v1: 34,3 38.25,3 41.75,3 34,6.5 38.25,6.5 41.75,6.5 34,10.75 38.25,10.75 41.75,10.75 34,14.25 38.25,14.25 41.75,14.25 34,17 38.25,17 41.75,17
IO0: Q2.3 R1.2 R3.1 U2.25 | length 140.4
  Top Layer w0.3: Q2.3 57.969,47.469 80,69.5 v1(129.25,69.5) ; U2.25 v1(130.75,93.75) ; R1.2 135.067,102.933 135.475,102.525 R3.1 136.75,102.393 v1(136.75,99.75)
  Bottom Layer w0.3: v1(129.25,69.5) 130.75,71 130.75,76.687 131,76.937 131,80.578 132,81.578 132,91.25 130.75,92.5 v1(130.75,93.75) v1(136.75,99.75)
IO2: P2.2 R5.2 U2.24 | length 150.5
  Top Layer w0.3: v1@124.96,86.25 U2.24 ; 124.96,89.301 130.949,89.301 R5.2
  Bottom Layer w0.3: P2.2 19.5,55 23.25,58.75 74.25,58.75 78.5,63 113.5,63 114,62.5 120.75,62.5 125,66.75 125,71.615 126,72.615 126,83.25 125,84.25 125,86.21 v1@124.96,86.25
  other v1: 125,86.25
IO4: R14.2 U2.26 | length 48.1
  Top Layer w0.3: U2.26 130.879,95.02 133.25,92.649 133.25,91.25 134,90.5 134,81.75 v1(135.25,80.5) ; v1(138.5,80.5) 155.5,80.5 159.317,84.317 R14.2
  Bottom Layer w0.3: v1(135.25,80.5) v1(138.5,80.5)
IO5: R13.2 U2.29 | length 45.1
  Top Layer w0.3: U2.29 129.67,98.83 136,92.5 136,82.5 v1(135.25,81.75) ; v1(138.5,81.75) 152,81.75 154.067,83.817 R13.2
  Bottom Layer w0.3: v1(135.25,81.75) v1(138.5,81.75)
IO12: R19.2 U2.14 | length 68.7
  Top Layer w0.3: R19.2 61.129,82.871 66,78 104.75,78 108.5,81.75 108.5,93 109.25,93.75 U2.14
IO13: R29.2 U2.16 | length 109.6
  Top Layer w0.3: v1(114.75,64.5) 115.25,65 120.25,65 123.75,61.5 123.75,57.5 v1(137,44.25) ; v1(114.75,90.25) U2.16@114.75,92.44 ; v1(172.25,22) R29.2@176,22
  Bottom Layer w0.3: v1(114.75,64.5) v1(114.75,90.25) ; v1(137,44.25) 159.25,22 v1(172.25,22)
IO14: R20.2 U2.13 | length 63.4
  Top Layer w0.3: R20.2 66.192,84.058 71.5,78.75 104.5,78.75 107.75,82 107.75,94.25 108.52,95.02 U2.13
IO15: R15.2 U2.23 | length 59.8
  Top Layer w0.3: U2.23 123.69,80.06 126,77.75 126.947,77.75 126.972,77.775 132.225,77.775 v1(132.25,77.75) ; v1(138.75,77.75) 157.25,77.75 164.567,85.067 R15.2
  Bottom Layer w0.3: v1(132.25,77.75) v1(138.75,77.75)
IO18: R18.2 U2.30 | length 117.6
  Top Layer w0.3: R18.2 56.067,82.683 65.25,73.5 130.25,73.5 131.75,75 135,75 136.425,76.425 136.425,92.825 129.15,100.1 U2.30
IO19: R17.2 U2.31 | length 77.7
  Top Layer w0.3: U2.31 128.63,101.37 140.75,89.25 v1(140.75,84.5) ; v1(140.75,73) 166.25,73 175.067,81.817 R17.2
  Bottom Layer w0.3: v1(140.75,73) v1(140.75,84.5)
IO21: P11.12 U2.33 | length 161
  Top Layer w0.3: v1(25.25,70) 25.25,80.25 27.075,82.075 P11.12 ; v1(51.75,72.5) 131.75,72.5 v1(133,73.75) ; U2.33 128.16,103.75 129.5,103.75 130,103.25 130,101.25 v1(135.75,95.5)
  Bottom Layer w0.3: v1(25.25,70) 27.75,72.5 v1(51.75,72.5) ; v1(133,73.75) 131.5,75.25 131.5,77.379 131.475,77.404 131.475,78.725 133,80.25 133,85.25 136.75,89 136.75,91.899 136.325,92.324 136.325,94.925 v1(135.75,95.5)
IO22: P11.13 U2.36 | length 172.5
  Top Layer w0.3: P11.13 27.325,81.425 25.75,79.85 25.75,71.5 29,68.25 v1(44.25,68.25) ; v1(97.75,75) 128.75,75 130,76.25 133.25,76.25 134.5,77.5 v1(134.5,79.25) ; U2.36 v1(129.78,107.72)
  Bottom Layer w0.3: v1(44.25,68.25) 47.725,71.725 52.071,71.725 55.346,75 v1(97.75,75) ; v1(129.78,107.72) 130.75,106.75 140.75,106.75 141.75,105.75 141.75,101.25 136.75,96.25 136.75,92.5 137.175,92.075 137.175,88.824 133.75,85.399 133.75,80 v1(134.5,79.25)
IO23: R16.2 U2.37 | length 75.6
  Top Layer w0.3: U2.37 130.01,108.99 132,107 132,102.351 142.5,91.851 v1(142.5,83.5) ; v1(142.5,75.25) 161.25,75.25 170.067,84.067 R16.2
  Bottom Layer w0.3: v1(142.5,75.25) v1(142.5,83.5)
IO25: R23.2 U2.10 | length 43.4
  Top Layer w0.3: R23.2 83.317,84.933 85.5,82.75 100,82.75 v1(101.75,84.5) ; v1(102.875,96.875) 104.83,98.83 U2.10
  Bottom Layer w0.3: v1(101.75,84.5) 101.75,95.75 v1(102.875,96.875)
IO26: R24.2 U2.11 | length 31.8
  Top Layer w0.3: R24.2 90.342,84.75 98.75,84.75 103.25,89.25 103.25,94.5 106.31,97.56 U2.11
IO27: R21.2 U2.12 | length 56.7
  Top Layer w0.3: R21.2 71.254,83.996 74.75,80.5 103.5,80.5 107,84 107,95 108.29,96.29 U2.12
IO32: R25.2 U2.8 | length 27.1
  Top Layer w0.3: R25.2 95.775,87.025 100.25,91.5 100.25,97.5 104.12,101.37 U2.8
IO33: R22.2 U2.9 | length 54.4
  Top Layer w0.3: R22.2 76.317,84.433 79,81.75 102,81.75 v1(104.75,84.5) ; v1(104.75,100) U2.9@110.4,100
  Bottom Layer w0.3: v1(104.75,84.5) v1(104.75,100)
IO35: P14.10 U2.7 | length 130.3
  Top Layer w0.3: v1(107.5,65.75) 128.25,65.75 139.206,54.794 139.206,46.294 v1(141.75,43.75) ; v1(107.5,102.64) U2.7 ; P14.10 128.87,24.37 v1(145,40.5)
  Bottom Layer w0.3: v1(107.5,65.75) v1(107.5,102.64) ; v1(141.75,43.75) v1(145,40.5)
LED1_N: P5.1 Q3.2 | length 7.3
  Top Layer w0.5: Q3.2 150.75,94.75 150.75,97.699 P5.1
LED2_N: P5.2 Q4.2 | length 7.3
  Top Layer w0.5: Q4.2 155.75,94.75 155.75,97.699 P5.2
LED3_N: P5.3 Q5.2 | length 7.3
  Top Layer w0.5: Q5.2 161,95 161,97.949 P5.3
LED4_N: P5.4 Q6.2 | length 7.3
  Top Layer w0.5: P5.4 166.25,98.199 166.25,95.25 Q6.2
LED5_N: P5.5 Q7.2 | length 7.3
  Top Layer w0.5: P5.5 171.25,98.199 171.25,95.25 Q7.2
LED6_N: P6.1 Q8.2 | length 7.7
  Top Layer w0.5: Q8.2 52.5,94.25 52.5,97.75 P6.1
LED7_N: P6.2 Q9.2 | length 7.8
  Top Layer w0.5: Q9.2 57.5,94.375 57.5,97.75 P6.2
LED8_N: P6.3 Q10.2 | length 7.8
  Top Layer w0.5: Q10.2 62.5,94.5 62.5,97.75 P6.3
LED9_N: P6.4 Q11.2 | length 7.9
  Top Layer w0.5: Q11.2 67.5,94.625 67.5,97.75 P6.4
LED10_N: P6.5 Q12.2 | length 7.9
  Top Layer w0.5: Q12.2 72.5,94.75 72.5,97.75 P6.5
LED11_N: P8.1 Q13.2 | length 7.9
  Top Layer w0.5: P8.1 79.5,97.801 79.5,94.75 Q13.2
LED12_N: P8.2 Q14.2 | length 7.2
  Top Layer w0.5: Q14.2@86,93.67 84.5,95.17 84.5,97.801 P8.2
LED13_N: P8.3 Q15.2 | length 7.9
  Top Layer w0.5: Q15.2 89.25,94.5 89.25,97.551 P8.3
NetC1_2: C1.2 R1.1 S1.2 | length 7.7
  Top Layer w0.3: S1.2 132.9,106.6 133.525,105.975 R1.1 135.118,105.118 135.475,105.475 C1.2
NetC2_2: C2.2 R2.1 S2.2 | length 6.8
  Top Layer w0.3: R2.1 103.025,105.975 103.433,105.567 C2.2 104.975,106.975 105.6,107.6 S2.2
NetC3_1: C3.1 C5.1 L1.1 U1.2 | length 24.1
  Top Layer w0.5: C5.1 L1.1 78.368,13.118 78.719,13.469 81.15,13.469 86.95,13.469 86.95,8.95 85.541,7.541 C3.1
NetC7_1: C7.1 D7.2 U3.1 | length 29.4
  Top Layer w0.5: D7.2@45.54,27.297 45.54,28.79 46.5,29.75 58.75,29.75 60.375,28.125 60.375,22.569 61.194,21.75 U3.1
  Top Layer w1: C7.1 D7.2@45.54,27.297
NetC10_2: C10.2 U4.7 Y1.1 | length 11.4
  Top Layer w0.3: Y1.1 23.933,38.154 C10.2 23.933,45.183 24.5,45.75 U4.7@25.75,45.75
NetC11_2: C11.2 U4.8 Y1.2 | length 12.8
  Top Layer w0.3: Y1.2 30.413,36.826 31.5,37.913 C11.2@31.5,41
  Top Layer w0.5: U4.8 27.305,43 30.5,43 31.567,41.933 C11.2
NetC12_1: C12.1 R37.1 | length 2.5
  Top Layer w0.3: C12.1 R37.1@97.618,43.975
NetC13_1: C13.1 P1.16 | length 5.9
  Top Layer w0.3: P1.16 v1(110.75,40.25)
  Bottom Layer w0.3: v1(110.75,40.25) 112.25,41.75 v1(113.5,41.75)
NetC21_1: C21.1 P11.28 | length 7.5
  Top Layer w0.3: P11.28 37.725,89.225 38.998,90.498 C21.1
NetC22_2: C22.2 P12.2 P12.3 | length 4.9
  Top Layer w0.3: C22.2@97.567,49.025 98.975,49.025 99.512,48.488 P12.3 P12.2
NetC23_1: C23.1 P12.4 R39.1 | length 8.8
  Top Layer w0.3: C23.1@97.618,46.475 98.725,46.475 99.468,47.218 P12.4 100.94,45.06 101.725,44.275 R39.1
NetC23_2: C23.2 R37.2 | length 2.5
  Top Layer w0.3: R37.2@95.433,43.975 C23.2@95.433,46.475
NetC26_2: C26.2 P11.23 | length 16.6
  Top Layer w0.3: P11.23 43.475,85.975 45.025,87.525 C26.2
NetC29_2: C29.2 P11.9 | length 13.6
  Top Layer w0.3: C29.2 18.975,78.225 24.775,84.025 P11.9
NetC30_2: C30.2 P11.4 | length 5.3
  Top Layer w0.3: C30.2 24.475,88.025 25.225,87.275 P11.4
NetC31_1: C31.1 P11.14 | length 4.2
  Top Layer w0.3: C31.1@28.54,76.579 P11.14
NetC32_1: C32.1 P11.17 | length 8.1
  Top Layer w0.3: P11.17 37.675,82.075 40.025,79.725 C32.1
NetC33_1: C33.1 P14.16 Y2.2 | length 36.7
  Top Layer w0.3: P14.16 v1(121.25,12) ; v1(132.25,13.25) 135.837,13.25 Y2.2
  Bottom Layer w0.3: v1@121.5,11.75 v1(121.25,12) 131,12 v1(132.25,13.25) ; Y2.2 141.837,9.75 146.5,9.75 147.75,8.5 v1(147.75,4.5)
NetC34_1: C34.1 C35.1 L5.2 P13.1 | length 7.2
  Top Layer w0.3: C34.1 C35.1 L5.2 ; P13.1 C34.1
NetC34_2: C34.2 L6.2 P14.3 | length 8.2
  Top Layer w0.3: C34.2 L6.2@118.851,6.25 ; L6.2 123.331,6.399 123.79,5.94 P14.3
NetC36_1: C36.1 P14.12 | length 7.9
  Top Layer w0.3: P14.12 126.33,8.42 127.25,7.5 131,7.5 131.5,8 C36.1
NetC37_1: C37.1 P14.13 | length 11.3
  Top Layer w0.3: C37.1 119.649,11.851 120.25,11.25 120.25,8.25 121,7.5 124.25,7.5 125.06,8.31 P14.13
NetC38_1: C38.1 C39.2 L7.1 P14.5 | length 14.2
  Top Layer w0.3: P14.5@126.25,4.58 P14.5 126.33,5.83 127,6.5 C38.1 133.899,5 C39.2 L7.1
NetC39_1: C39.1 P14.8 R43.2 | length 4
  Top Layer w0.3: P14.8 130.64,5 C39.1 R43.2
NetD1_1: D1.1 USB1.1 | length 12.1
  Top Layer w0.3: USB1.1 D1.1@19.191,38.941
NetD2_1: D2.1 R5.1 | length 2.2
  Top Layer w0.3: D2.1@130.949,83.485 R5.1
NetD3_1: D3.1 R6.1 | length 2.2
  Top Layer w0.3: D3.1@128.449,83.485 R6.1
NetD6_1: D6.1 R8.1 | length 3.8
  Top Layer w0.3: D6.1 R8.1
NetD7_1: D7.1 R10.2 | length 3.2
  Top Layer w1: R10.2 49.313,26.878 D7.1
NetD8_2: D8.2 L2.1 U3.2 | length 36.5
  Top Layer w0.2: L2.1@57.444,8.746 L2.1@57.75,9.052
  Top Layer w0.5: D8.2 56,28 56.75,28.75 58.5,28.75 59.75,27.5 59.75,16.5 ; L2.1@57.444,8.746 57.444,15.444 58.5,16.5 64.25,16.5 64.972,17.222 U3.2
NetD9_1: D9.1 R28.1 | length 2.3
  Top Layer w0.3: R28.1 D9.1
NetD9_2: D9.2 P1.13 | length 5.9
  Top Layer w0.3: P1.13 D9.2@114.081,36.44
NetP9_1: P9.1 R27.2 | length 11.1
  Top Layer w0.5: R27.2 183.75,16.676 P9.1
NetP9_2: P9.2 R29.1 | length 7.4
  Top Layer w0.3: v1(176.75,19.25) 176.75,17.75 178.75,15.75 178.75,13.25 P9.2@178.5,13
  Top Layer w0.5: P9.2@178.5,13 P9.2
NetP10_1: P10.1 R38.1 | length 2.6
  Bottom Layer w0.3: P10.1 R38.1@8.132,103.58
NetP10_2: P10.2 R40.1 | length 2.6
  Bottom Layer w0.3: P10.2@5.515,101.025 R40.1@8.132,101.025
NetP10_3: P10.3 R41.1 | length 2.6
  Bottom Layer w0.3: P10.3 R41.1@8.107,98.5
NetP10_4: P10.4 R44.1 | length 2.6
  Bottom Layer w0.3: P10.4 R44.1@8.067,95.96
NetP10_5: P10.5 R45.1 | length 2.5
  Bottom Layer w0.3: P10.5 R45.1@8.027,93.42
NetP10_6: P10.6 R46.1 | length 2.5
  Bottom Layer w0.3: P10.6 R46.1@7.987,90.88
NetP10_7: P10.7 R47.1 | length 2.4
  Bottom Layer w0.3: P10.7 R47.1@7.947,88.34
NetP10_8: P10.8 R48.1 | length 2.7
  Bottom Layer w0.3: P10.8 6.55,85.8 6.775,86.025 R48.1
NetP10_9: P10.9 R49.1 | length 2.7
  Bottom Layer w0.3: P10.9 6.76,83.26 7.025,83.525 R49.1
NetP10_10: P10.10 R50.1 | length 2.8
  Bottom Layer w0.3: P10.10 6.72,80.72 7.025,81.025 R50.1
NetP10_11: P10.11 R51.1 | length 2.8
  Bottom Layer w0.3: P10.11 6.68,78.18 7.025,78.525 R51.1
NetP10_12: P10.12 R52.1 | length 2.8
  Bottom Layer w0.3: P10.12 6.64,75.64 7.025,76.025 R52.1
NetP10_13: P10.13 R53.1 | length 2.8
  Bottom Layer w0.3: P10.13 6.35,73.1 6.775,73.525 R53.1
NetP10_14: P10.14 R54.1 | length 2.8
  Bottom Layer w0.254: P10.14 6.56,70.56 7.025,71.025 R54.1
NetP10_15: P10.15 R55.1 | length 2.8
  Bottom Layer w0.3: P10.15 6.52,68.02 7.025,68.525 R55.1
NetP10_16: P10.16 R56.1 | length 2.9
  Bottom Layer w0.3: P10.16 6.48,65.48 7.025,66.025 R56.1
NetP11_1: P11.1 R34.2 R44.2 | length 23.9
  Top Layer w0.3: v1@12.25,95.975 R34.2 ; v1(21,95.5) 21,94.25 26.025,89.225 P11.1
  Bottom Layer w0.3: R44.2 v1@12.225,96.025 ; v1(12.25,96) 20.5,96 v1(21,95.5)
NetP11_2: P11.2 R31.2 R41.2 | length 28
  Top Layer w0.3: v1@12.25,98.475 R31.2 ; v1(21,98) 20,97 20,94.41 25.835,88.575 P11.2
  Bottom Layer w0.3: R41.2@10.317,98.525 v1@12.225,98.525 ; v1(12.25,98.5) 18,98.5 18.5,98 v1(21,98)
NetP11_5: P11.5 R35.2 R40.2 | length 33.4
  Top Layer w0.3: v1@12.25,100.975 R35.2@14.433,100.975 ; v1(19.75,99.25) 19.575,99.075 19.575,87.675 20.625,86.625 P11.5
  Bottom Layer w0.3: R40.2@10.317,101.025 v1@12.225,101.025 ; v1(12.25,101) 13,100.25 18.75,100.25 v1(19.75,99.25)
NetP11_6: P11.6 R38.2 | length 34.7
  Top Layer w0.3: v1(16.75,103.5) 18,103.5 18.67,102.83 18.67,87.33 20.025,85.975 P11.6
  Bottom Layer w0.3: R38.2 14.525,103.725 14.75,103.5 v1(16.75,103.5)
NetP11_7: P11.7 R56.2 | length 31.6
  Top Layer w0.3: v1(13.5,69.25) 16,71.75 16,78 23.325,85.325 P11.7
  Bottom Layer w0.3: R56.2 12.525,66.025 13.5,67 v1(13.5,69.25) ; R56.2@10.5,65.75 R56.2@10.75,66
NetP11_8: P11.8 R55.2 | length 29.4
  Top Layer w0.3: v1(12.25,68.02) 14.52,68.02 16.75,70.25 16.75,77.25 24.175,84.675 P11.8
  Bottom Layer w0.3: R55.2 11.745,68.525 v1(12.25,68.02)
NetP11_10: P11.10 R54.2 | length 27.9
  Top Layer w0.3: v1(23,81) 25.375,83.375 P11.10
  Bottom Layer w0.3: R54.2@10.317,71 20.75,71 23,73.25 v1(23,81)
NetP11_11: P11.11 R53.2 | length 25.6
  Top Layer w0.3: v1(22,79.25) 23,79.25 26.475,82.725 P11.11
  Bottom Layer w0.3: R53.2 15.475,73.525 16.25,72.75 20.5,72.75 22,74.25 v1(22,79.25)
NetP11_15: P11.15 R52.2 | length 35.1
  Top Layer w0.3: v1(35.5,76) P11.15@35.5,80.735
  Bottom Layer w0.3: R52.2 11.525,76.025 17.75,82.25 23,82.25 29.25,76 v1(35.5,76)
NetP11_16: P11.16 R51.2 | length 37.8
  Top Layer w0.3: P11.16 37.075,81.425 38.25,80.25 v1(38.25,77.5)
  Bottom Layer w0.3: R51.2 12.025,78.525 16.175,82.675 23.176,82.675 23.851,82 24.25,82 28.75,77.5 v1(38.25,77.5)
NetP11_18: P11.18 R50.2 | length 49.2
  Top Layer w0.3: P11.18 38.025,82.725 41,79.75 v1(45,79.75)
  Bottom Layer w0.3: R50.2 12.775,81.025 14.85,83.1 23.9,83.1 29.075,77.925 35.675,77.925 37,79.25 44.5,79.25 v1(45,79.75)
NetP11_19: P11.19 R49.2 | length 45.9
  Top Layer w0.3: P11.19 38.375,83.375 40.75,81 v1(43.75,81)
  Bottom Layer w0.3: R49.2 24.076,83.525 29.251,78.35 35.499,78.35 36.824,79.675 42.425,79.675 v1(43.75,81)
NetP11_21: P11.21 R36.2 R48.2 | length 46.2
  Top Layer w0.3: v1@12.25,85.975 R36.2 ; P11.21 38.075,84.675 40.5,82.25 v1(41.75,82.25)
  Bottom Layer w0.3: R48.2 12.25,86.025 22.177,86.025 29.427,78.775 35.323,78.775 36.648,80.1 41.1,80.1 41.75,80.75 v1(41.75,82.25)
  other v1: 12.25,86
NetP11_22: P11.22 R33.2 R47.2 | length 43.5
  Top Layer w0.3: v1@12.25,88.475 R33.2 ; P11.22 38.925,85.325 v1(40.5,83.75)
  Bottom Layer w0.3: R47.2 v1@12.225,88.525 ; v1(12.25,88.5) 14.75,91 35.75,91 40.5,86.25 v1(40.5,83.75)
NetP11_24: P11.24 R32.2 R46.2 | length 45.9
  Top Layer w0.3: v1@12.25,90.975 R32.2 ; P11.24 41.875,86.625 v1(43.25,88)
  Bottom Layer w0.3: R46.2 v1@12.225,91.025 ; v1(12.25,91) 13,91.75 35.75,91.75 40.25,87.25 42.5,87.25 v1(43.25,88)
NetP11_25: P11.25 R30.2 R45.2 | length 42.5
  Top Layer w0.3: v1@12.25,93.475 R30.2 ; P11.25 40.525,87.275 v1(41.75,88.5)
  Bottom Layer w0.3: R45.2 35.225,93.525 40.25,88.5 v1(41.75,88.5)
  other v1: 12.25,93.5
NetP14_1: P14.1 Y2.1 | length 32.4
  Top Layer w0.3: v1(121.25,2.75) P14.1
  Bottom Layer w0.3: v1(121.25,2.75) 122.25,1.75 144.25,1.75 145.413,2.913 Y2.1
NetP14_11: P14.11 R42.2 | length 6.5
  Top Layer w0.3: P14.11 127.6,8.65 128,8.25 130.5,8.25 131.75,9.5 R42.2
NetQ1_1: Q1.1 R7.2 | length 2.2
  Top Layer w0.3: R7.2@37.022,50.519 Q1.1
NetQ2_1: Q2.1 R9.1 | length 6.9
  Top Layer w0.3: R9.1 34.475,46.275 v1(34.5,46.25) ; v1(37.75,46.5) 37.769,46.519 Q2.1
  Bottom Layer w0.3: v1(34.5,46.25) 36.5,46.25 36.75,46.5 v1(37.75,46.5)
NetQ3_3: Q3.3 R13.1 | length 3.3
  Top Layer w0.5: R13.1@152,87.643 Q3.3
NetQ4_3: Q4.3 R14.1 | length 3.2
  Top Layer w0.5: R14.1@157,87.658 Q4.3
NetQ5_3: Q5.3 R15.1 | length 3.3
  Top Layer w0.5: R15.1@162.5,87.643 Q5.3
NetQ6_3: Q6.3 R16.1 | length 3.3
  Top Layer w0.5: R16.1@168,87.643 Q6.3
NetQ7_3: Q7.3 R17.1 | length 3.3
  Top Layer w0.5: R17.1@173,87.643 Q7.3
NetQ8_3: Q8.3 R18.1 | length 3.2
  Top Layer w0.5: R18.1@53.75,87.158 Q8.3
NetQ9_3: Q9.3 R19.1 | length 3.3
  Top Layer w0.5: R19.1@58.875,87.095 Q9.3
NetQ10_3: Q10.3 R20.1 | length 3.4
  Top Layer w0.5: R20.1@64,87.033 Q10.3
NetQ11_3: Q11.3 R21.1 | length 3.3
  Top Layer w0.5: R21.1@69.125,87.08 Q11.3
NetQ12_3: Q12.3 R22.1 | length 3.3
  Top Layer w0.5: R22.1@74.25,87.143 Q12.3
NetQ13_3: Q13.3 R23.1 | length 3.3
  Top Layer w0.5: R23.1@81.25,87.143 Q13.3
NetQ14_3: Q14.3 R24.1 | length 3.3
  Top Layer w0.5: R24.1@86,87.143 Q14.3
NetQ15_3: Q15.3 R25.1 | length 3.3
  Top Layer w0.5: R25.1@90.75,87.143 Q15.3
NetR10_1: R10.1 S3.2 | length 3.9
  Top Layer w1: R10.1 46.15,21.787 S3.2
NetR11_1: R11.1 U4.3 | length 11.9
  Top Layer w0.3: U4.3 24.845,50.905 23.75,52 23.75,55.5 27.025,58.775 R11.1
NetR12_1: R12.1 U4.2 | length 8.3
  Top Layer w0.3: U4.2 25.675,52.25 25,52.25 24.25,53 24.25,54.5 26.275,56.525 R12.1
NetR26_1: R26.1 SD1.9 | length 17.6
  Top Layer w0.3: SD1.9 v1(93.106,19.856)
  Bottom Layer w0.3: v1(93.106,19.856) 101.606,19.856 102.75,21 v1(102.75,24)
RTS: Q1.2 R9.2 U4.14 | length 9.1
  Top Layer w0.3: U4.14 R9.2@34.25,50.905 ; R9.2 34.567,50.659 34.567,51.817 35.169,52.419 Q1.2
RX: P1.11 U2.28 | length 91.7
  Top Layer w0.3: P1.11 v1(110.15,33.9) ; v1(119,43.25) v1(119,63.75) ; U2.28 129.69,97.56 v1(134.75,92.5) v1@134.75,92.702 ; v1(130.5,90.25) 131.5,90.25 v1(133,88.75)
  Bottom Layer w0.3: v1(110.15,33.9) 114.9,33.9 119,38 v1(119,43.25) ; v1(119,63.75) 121.75,66.5 121.75,86 125.051,89.301 129.551,89.301 v1(130.5,90.25) ; v1(133,88.75) 135.5,88.75 136,89.25 136,92 135.5,92.5 v1(134.75,92.5)
RXD0: R12.2 U2.34 | length 153
  Top Layer w0.3: R12.2@30.5,56.5 32,56.5 32.75,57.25 32.75,58.25 v1(36.75,62.25) ; v1(104.5,68.25) 134.75,68.25 136.85,70.35 136.85,86.1 v1(137.75,87) ; U2.34 129.82,105.18 130.75,104.25 130.75,101.75 136.75,95.75 136.75,94.5 v1(137.75,93.5)
  Bottom Layer w0.3: v1(36.75,62.25) 62.75,62.25 66.75,66.25 102.5,66.25 v1(104.5,68.25) ; v1(137.75,87) v1(137.75,93.5)
SDCLK: P1.6 R26.2 SD1.5 | length 24.1
  Top Layer w0.3: SD1.5 97.506,22.506 R26.2@99.75,24.75 ; v1(98.75,29.25) 99.933,28.067 R26.2 ; v1@98.9,33.9 P1.6
  Bottom Layer w0.3: v1(98.75,29.25) v1(98.75,33.9)
SDCMD: P1.7 SD1.3 | length 24
  Top Layer w0.3: SD1.3@99.706,15.25 SD1.3 99.706,20.206 101.25,21.75 103.25,21.75 104.25,22.75 104.25,25.5 v1@100.75,29 ; v1(100.88,32.63) P1.7
  Bottom Layer w0.3: v1(100.88,29) v1(100.88,32.63)
SDDAT: P1.8 SD1.7 | length 22
  Top Layer w0.3: SD1.7@95.306,15.556 95.306,18.869 96.5,20.062 96.5,30 97.86,31.36 P1.8
SPK1: P3.1 P12.5 R39.2 | length 81.3
  Top Layer w0.3: R39.2 v1@108.725,44.275 ; v1(108.75,44.25) P12.5@108.75,47.25 ; v1(123.75,42.25) 145.25,42.25 166.5,21 P3.1
  Bottom Layer w0.3: v1(108.75,44.25) 120.75,44.25 122.75,42.25 v1(123.75,42.25)
SPK2: P3.3 P12.8 | length 70.9
  Top Layer w0.3: P12.8 114.972,51.028 116,50 v1(116,46.5)
  Bottom Layer w0.3: v1(116,46.5) 131.75,46.5 156.5,21.75 P3.3
TX: P1.12 U2.27 | length 87.4
  Top Layer w0.3: P1.12 v1(110.92,35.17) ; v1(117,63.75) 117.75,63 v1(117.75,43.25) ; U2.27 130.21,96.29 133.675,92.825 133.675,91.575 v1(135,90.25) ; v1(129,90.75) 129.75,91.5 131.75,91.5 v1(133,90.25)
  Bottom Layer w0.3: v1(110.92,35.17) 114.42,35.17 117.75,38.5 v1(117.75,43.25) ; v1(117,63.75) 120.75,67.5 120.75,85.75 125.75,90.75 v1(129,90.75) ; v1(133,90.25) v1(135,90.25)
TXD0: R11.2 U2.35 | length 155.2
  Top Layer w0.3: R11.2@30.5,58.75 31.5,58.75 v1(32.75,60) ; v1(36.5,60) 37,60.5 v1(44.25,60.5) ; v1(106,66.75) 135.5,66.75 137.725,68.975 137.725,82.725 139,84 v1(139,85.25) ; U2.35 130.05,106.45 131.25,105.25 131.25,102.5 137.725,96.025 v1(137.725,95.225)
  Bottom Layer w0.3: v1(32.75,60) v1(36.5,60) ; v1(44.25,60.5) 75.399,60.5 79.824,64.925 104.175,64.925 v1(106,66.75) ; v1(137.725,95.225) 139,93.95 v1(139,85.25)
pads on no net: P1.1 P1.2 P1.9 P1.10 P11.3 P14.6 P14.7 P14.14 P14.15 SD1.1 SD1.2 SD1.8 U2.4 U2.5 U2.6 U2.17 U2.18 U2.19 U2.20 U2.21 U2.22 U2.32 U4.9 U4.10 U4.11 U4.12 U4.15 USB1.4
copper on no net:
  other v1: 212,3.5 225.75,3.5 238,3.5 212,7.635 225.75,7.635 238,7.635 212,11.771 225.75,11.771 238,11.771 212,15.906 225.75,15.906 238,15.906 212,20.042 225.75,20.042 238,20.042 212,24.177 225.75,24.177 238,24.177 212,28.312 225.75,28.312 238,28.312 212,32.448 225.75,32.448 238,32.448 212,36.583 225.75,36.583 238,36.583 212,40.719 225.75,40.719 238,40.719 212,44.854 225.75,44.854 238,44.854 212,48.99 225.75,48.99 238,48.99 212,53.125 225.75,53.125 238,53.125 212,57.26 225.75,57.26 238,57.26 212,61.396 225.75,61.396 238,61.396 212,65.531 225.75,65.531 238,65.531 212,69.667 225.75,69.667 238,69.667 212,73.802 225.75,73.802 238,73.802 212,77.937 225.75,77.937 238,77.937 212,82.073 225.75,82.073 238,82.073 212,86.208 225.75,86.208 238,86.208 212,90.344 225.75,90.344 238,90.344 212,94.479 225.75,94.479 238,94.479 212,98.615 225.75,98.615 238,98.615 212,102.75 225.75,102.75 238,102.75
  other v3: 94.77,4.865 102.771,4.865

## Polygon pours and split planes (outlines as drawn)
GND on Top Layer "top poly" (solid, remove dead copper, pour order 1000): 1,111.5 252,111.5 252,0 1,0
GND on Bottom Layer "bottom poly" (solid, remove dead copper, pour order 1001): 1,111.5 252,111.5 252,0 1,0

## Keep-outs
Keep-Out Layer:
  lines w0.3: 0,2 ccw(c2,2) 2,0 250,0 ccw(c250,2) 252,2 252,109.5 ccw(c250,109.5) 250,111.5 2,111.5 ccw(c2,109.5) 0,109.5 0,2

## Other copper
Top Layer:
  rectangle net GND: 50.25,17.5 58.75,21.75
  rectangle net GND: 43.25,1 53,18.25
  rectangle net GND: 30.5,23.5 38.75,32.25
  rectangle net GND_NOISY: 29.75,1 42.75,18.25
  rectangle net +12V: 6.75,23.75 29.25,31
  rectangle net +12V_NOISY: 6.75,14.25 24.25,23
  region net +3V3: 72,16.5 73.25,17.75 74.5,16.5
  region net NetD8_2: 59,16.5 59.75,17.25 60.5,16.5
  pour cut-out: 2.75,42.75 2.75,31.25 1,31.25 1,42.75
  region net +5V: 84.5,40.25 86,38.75 84.5,37.5
  region net +5V: 84.5,55 86,54 85.25,53.5 84.5,53
Bottom Layer:
  rectangle net GND: 21.25,46.75 27,49
  rectangle net GND: 12.25,43 22.75,47.5
  rectangle net GND_NOISY: 29.75,1 42.75,18.25
  rectangle net GND: 2.75,32.5 10,42.75
  rectangle net GND: 4.5,42.5 14,47.25
  region net GND: 78.75,7.25 78,8 78,8.067 78.067,8.067 78.75,8.75
  region net +3V3: 91.25,21.75 92.25,22.75 90.25,22.75
  pour cut-out: 2.75,42.75 2.75,31.25 1,31.25 1,42.75

## Text inside footprints (layer, text, board x,y; h text height)
U2: Mechanical 13 "TOP LAYER" at 119.25,109 h0.8; Mechanical 13 "AVOID TRACES IN" at 119.25,110 h0.8
USB1: Mechanical 1 "PCB EDGE" at 2.388,35.841 h0.8 r90